# EAGLE board PositionSensor (EAGLE 7.7.0)
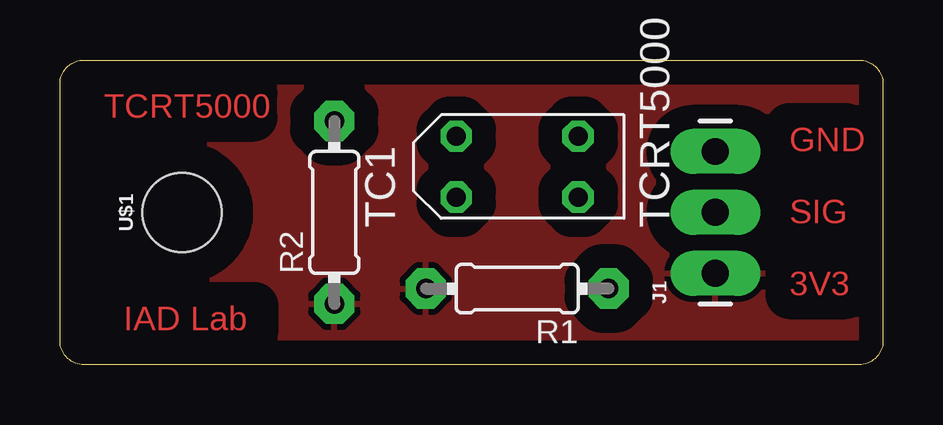
[diagram p0: board, top side]
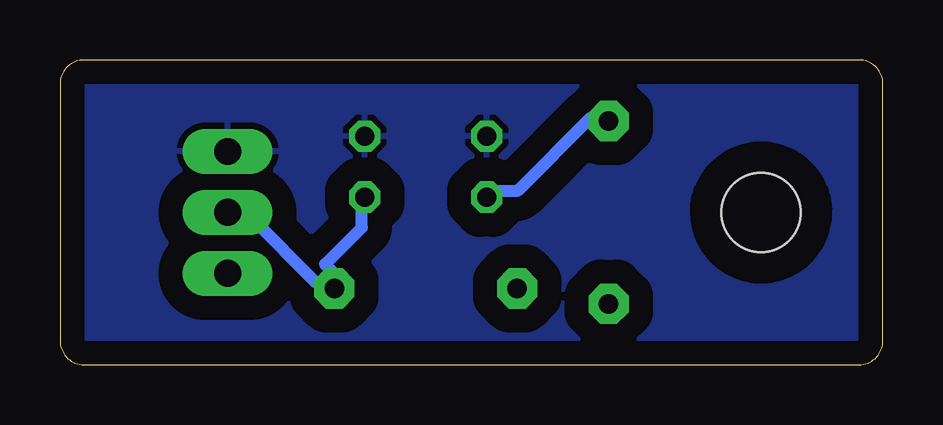
[diagram p1: board, bottom side, seen from below]

Size 34.29 x 12.7 mm. Coordinates in mm from the lower left corner, seen from the top.
Outline: 1,12.7 33.29,12.7 arc-90 34.29,11.7 34.29,1 arc-90 33.29,0 1,0 arc-90 0,1 0,11.7 arc-90 1,12.7
Copper layers (1*16): Top 0.035mm / dielectric 1.5mm / Bottom 0.035mm
Design rules "SparkFun-2-layer-STANDARD *": minimum track width 20mil, minimum drill 20mil, track to track 10mil, track to pad 10mil, pad to pad 10mil, via to via 10mil, smd to smd 8mil, copper to edge 8mil, drill to drill 8mil, minimum pad ring 10mil, minimum via ring 10mil, stop-mask expansion 4mil, vias tented up to drill 25mil, thermal gap 10mil

## Footprints (pad centres in the part's own frame; a part is rotated, then mirrored left to right if it is on the bottom)
1X03_LONGPADS = drill 1.118 pad 1.88 long: 1 0,0; 2 2.54,0; 3 5.08,0
0204/7 = drill 0.813 pad 1.676 octagon: 1 -3.81,0; 2 3.81,0
TCRT5000 = drill 0.8 octagon: A -1.27,2.54; C -1.27,-2.54; E 1.27,-2.54; K 1.27,2.54
STAND-OFF = hole 3.302: 0,0

## Placement (x,y rotation side)
J1  [1X03_LONGPADS]  27.3,3.81 90 top
R1  22K  [0204/7]  19.05,3.17 180 top
R2  47R  [0204/7]  11.43,6.35 90 top
TC1  TCRT5000  [TCRT5000]  19.05,8.26 90 top
U$1  [STAND-OFF]  5.08,6.35 90 top

## Library data of the parts
J1 = SparkFun-Connectors
R1 R2 = adafruit
TC1 = Library
U$1 = SparkFun-Hardware

## Nets
3V3: J1.1 R1.2 R2.1
GND: J1.3 TC1.E TC1.K
N$1: R2.2 TC1.A
SIG: J1.2 R1.1 TC1.C

## Tracks (layer width: path | path; a pad name or v marks a point on that pad's centre or on a via)
3V3
  pour Top (isolate 1): 1,12.7 33.29,12.7 arc-90 34.29,11.7 34.29,1 arc-90 33.29,0 1,0 arc-90 0,1 0,11.7 arc-90
GND
  pour Bottom (isolate 1, rank 6): 34.29,1 34.29,11.7 arc90 33.29,12.7 1,12.7 arc90 0,11.7 0,1 arc90 1,0 33.29,0 arc90
N$1
  Bottom 0.508: TC1.A 16.38,7.24 15.24,7.24 12.19,10.29 11.43,10.29 R2.2
SIG
  Bottom 0.508: TC1.C 21.72,6.86 21.72,5.71 23.24,4.19 22.48,3.43 22.86,3.05 R1.1 22.86,3.43 23.62,3.43 26.29,6.1 27.05,6.1 J1.2

## Text on the board
Top: TCRT5000 | GND / / SIG / / 3V3 | IAD Lab